# EAGLE board board (EAGLE 7.5.0)
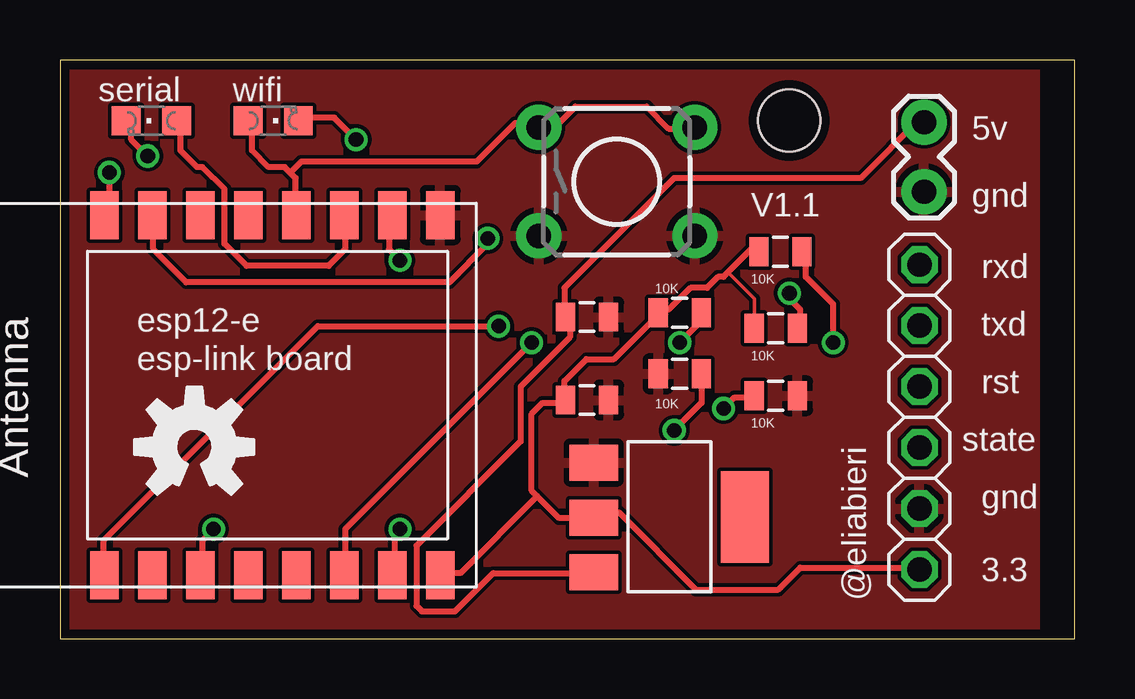
[diagram p0: board, top side]
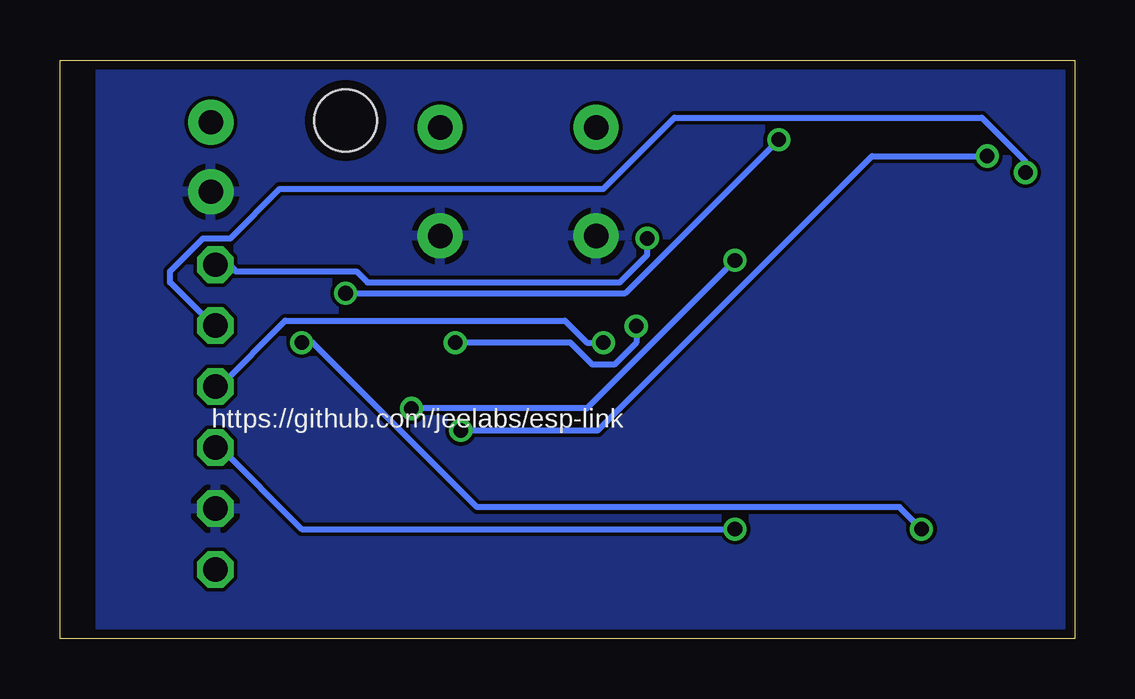
[diagram p1: board, bottom side, seen from below]

Size 42.31 x 24.12 mm. Coordinates in mm from the lower left corner, seen from the top.
Outline: 0,0 42.31,0 42.31,24.12 0,24.12 0,0
Copper layers (1*16): Top 0.0356mm / dielectric 1.5011mm / Bottom 0.0356mm
Design rules "LaenPCBOrder": minimum track width 6mil, minimum drill 13mil, track to track 6mil, track to pad 6mil, pad to pad 6mil, via to via 6mil, smd to smd 6mil, copper to edge 15mil, drill to drill 6mil, minimum pad ring 7mil, minimum via ring 7mil, stop-mask expansion 3mil, vias tented up to drill 0mil, thermal gap 10mil
Holes 2.6 mm at 30.4,21.6

## Footprints (pad centres in the part's own frame; a part is rotated, then mirrored left to right if it is on the bottom)
TACTILE-PTH = drill 1.016 pad 1.88: 1 -3.251,2.261; 2 3.251,2.261; 3 -3.251,-2.261; 4 3.251,-2.261
0805 = smd 0.8 x 1.2: 1 -0.9,0; 2 0.9,0
1X06 = drill 1.016 octagon: 1 -6.35,0; 2 -3.81,0; 3 -1.27,0; 4 1.27,0; 5 3.81,0; 6 6.35,0
SOT223 = smd 1.499 x 2.007: 1 -2.261,-3.15; 2 0.025,-3.15; 3 2.311,-3.15 | smd 3.81 x 2.007: 4 0,3.15
1X02_LOCK = drill 1.016 pad 1.88: 1 -0.178,0; 2 2.718,0
CHIPLED_0805 = smd 1.2 x 1.2: A 0,-1.05; C 0,1.05
ESP-12 = smd 2 x 1.2: 1 -7.5,4.5; 2 -7.5,2.5; 3 -7.5,0.5; 4 -7.5,-1.5; 5 -7.5,-3.5; 6 -7.5,-5.5; 7 -7.5,-7.5; 8 -7.5,-9.5; 9 7.5,-9.5; 10 7.5,-7.5; 11 7.5,-5.5; 12 7.5,-3.5; 13 7.5,-1.5; 14 7.5,0.5; 15 7.5,2.5; 16 7.5,4.5

## Placement (x,y rotation side)
BTN  [TACTILE-PTH]  23.21,19.05 0 top
CHPDUP  10K  [0805]  30.03,16.13 180 top
GPIO15DOWN  10K  [0805]  29.84,10.13 180 top
HEADER  [1X06]  35.83,9.24 270 top
IC1  REG1117  [SOT223]  25.4,5.08 270 top
INPUTCAP  10uF  [0805]  21.97,13.41 0 top
JP1  [1X02_LOCK]  36.02,18.81 90 top
OUTPUTCAP  10uF  [0805]  21.97,9.95 0 top
RSTUP  10K  [0805]  25.84,13.59 180 top
SERIAL  [CHIPLED_0805]  3.81,21.59 90 top
SERRES  10K  [0805]  25.84,11.05 180 top
U$1  [OSHW-LOGO-M]  5.6,8 0 top
WIFI  [CHIPLED_0805]  8.89,21.59 270 top
WIFIRES  10K  [0805]  29.84,12.94 180 top
X1  [ESP-12]  6.35,10.16 90 top

## Library data of the parts
BTN = SparkFun-Retired
CHPDUP GPIO15DOWN INPUTCAP OUTPUTCAP RSTUP SERRES WIFIRES = SparkFun-Passives
HEADER SERIAL WIFI X1 = adafruit
IC1 = 1117; MPN: REG1117; OC_FARNELL: 1097566; OC_NEWARK: 14P6981
JP1 = SparkFun-Connectors
U$1 = SparkFun-Aesthetics

## Nets
GND: BTN.3 BTN.4 GPIO15DOWN.1 HEADER.5 IC1.1 INPUTCAP.2 JP1.1 OUTPUTCAP.2 SERRES.2 X1.9
N$1: HEADER.1 X1.15
N$2: HEADER.2 X1.16
N$3: HEADER.3 X1.6
N$4: HEADER.4 X1.7
N$5: BTN.1 BTN.2 WIFI.A X1.12
N$6: SERIAL.C SERRES.1
N$7: WIFI.C WIFIRES.1
N$8: CHPDUP.1 X1.3
N$9: SERIAL.A X1.11
N$10: GPIO15DOWN.2 X1.10
N$11: RSTUP.1 X1.1
N$12: IC1.3 INPUTCAP.1 JP1.2
VCC: CHPDUP.2 HEADER.6 IC1.2 OUTPUTCAP.1 RSTUP.2 WIFIRES.2 X1.8

## Tracks (layer width: path | path; a pad name or v marks a point on that pad's centre or on a via)
GND
  pour Bottom: 0,0 0,24.13 40.64,24.13 40.64,0
  pour Top: 0,0 0,24.13 40.64,24.13 40.64,0
N$1  (via drill 0.61)
  Top 0.254: v17.83,16.69 17.83,16.46 16.23,14.86 5.26,14.86 3.89,16.23 3.89,17.6 X1.15
  Bottom 0.254: v17.83,16.69 17.83,16 18.97,14.86 29.49,14.86 29.95,15.32 34.98,15.32 35.2,15.54 35.66,15.54 HEADER.1
N$2  (via drill 0.61)
  Top 0.254: v2.06,19.43 2.06,17.83 X1.16
  Bottom 0.254: v2.06,19.43 2.06,19.89 3.89,21.72 16.69,21.72 19.66,18.75 33.15,18.75 35.2,16.69 36.35,16.69 37.72,15.32 37.72,14.86 35.89,13.03 HEADER.2
N$3  (via drill 0.61)
  Top 0.254: v19.66,12.34 11.89,4.57 11.89,2.74 X1.6
  Bottom 0.254: v19.66,12.34 20.34,12.34 21.26,13.26 32.92,13.26 35.66,10.52 HEADER.3
N$4  (via drill 0.61)
  Top 0.254: v14.17,4.57 13.95,4.34 13.95,2.74 X1.7
  Bottom 0.254: v14.17,4.57 32.23,4.57 35.66,8 HEADER.4
N$5
  Top 0.254: 9.6,19.43 9.83,19.2 9.83,17.83 X1.12 | 9.6,19.43 9.37,19.66 8.69,19.66 8,20.34 8,21.49 WIFI.A | 9.6,19.43 10.06,19.89 17.37,19.89 18.97,21.49 19.89,21.49 BTN.1 20.12,21.49 20.8,21.49 21.49,22.17 24.46,22.17 25.38,21.26 26.29,21.26 BTN.2
N$6  (via drill 0.61)
  Top 0.254: v3.66,20.12 2.97,20.8 2.97,21.49 SERIAL.C | v25.6,8.69 26.75,9.83 26.75,10.97 SERRES.1
  Bottom 0.254: v3.66,20.12 8.46,20.12 19.89,8.69 v25.6,8.69
N$7  (via drill 0.61)
  Top 0.254: v12.34,20.8 11.43,21.72 10.06,21.72 WIFI.C | v30.4,14.4 30.4,14.17 30.86,13.72 30.86,13.03 WIFIRES.1
  Bottom 0.254: v12.34,20.8 18.75,14.4 v30.4,14.4
N$8  (via drill 0.61)
  Top 0.254: v32.23,12.34 32.23,13.95 31.09,15.09 31.09,16 CHPDUP.1 | v6.4,4.57 5.94,4.12 5.94,2.74 X1.3
  Bottom 0.254: v32.23,12.34 31.77,12.34 24.92,5.49 7.32,5.49 v6.4,4.57
N$9
  Top 0.254: SERIAL.A 5.03,21.49 5.03,20.34 5.71,19.66 5.94,19.66 6.86,18.75 6.86,16.46 7.77,15.54 11.2,15.54 11.89,16.23 11.89,17.6 X1.11
N$10  (via drill 0.61)
  Top 0.254: v27.66,9.6 28.12,10.06 28.8,10.06 GPIO15DOWN.2 | v14.17,15.77 13.72,16.23 13.72,17.6 X1.10
  Bottom 0.254: v27.66,9.6 20.34,9.6 v14.17,15.77
N$11  (via drill 0.61)
  Top 0.254: v25.83,12.34 26.52,13.03 26.52,13.49 RSTUP.1 | v18.29,13.03 10.74,13.03 1.83,4.12 1.83,2.74 X1.1
  Bottom 0.254: v25.83,12.34 21.03,12.34 20.12,11.43 19.2,11.43 18.29,12.34 v18.29,13.03
N$12
  Top 0.254: JP1.2 35.89,21.72 33.38,19.2 25.6,19.2 21.03,14.63 21.03,13.49 INPUTCAP.1 21.26,13.26 21.26,12.57 19.2,10.52 19.2,8.23 14.86,3.89 14.86,1.37 15.09,1.14 16.46,1.14 18.06,2.74 22.17,2.74 IC1.3
VCC
  Top 0.152: 27.85,15.28 28.96,14.17 28.96,12.95 WIFIRES.2
  Top 0.254: CHPDUP.2 29.26,16.23 29.03,16.46 27.85,15.28 27.66,15.09 27.43,15.09 26.98,14.63 26.29,14.63 25.38,13.72 25.15,13.72 RSTUP.2 24.92,13.49 23.09,11.66 21.95,11.66 21.03,10.74 21.03,10.06 OUTPUTCAP.1 21.03,9.83 20.12,9.83 19.66,9.37 19.66,6.17 19.89,5.94 | 19.89,5.94 20.8,5.03 22.17,5.03 IC1.2 22.4,5.26 23.32,5.26 26.52,2.06 29.95,2.06 30.86,2.97 35.66,2.97 HEADER.6 | 19.89,5.94 16.69,2.74 16,2.74 X1.8

## Text on the board
tNames: serial | wifi | 5v | V1.1 | gnd | 10K | rxd | 10K | esp12-e | txd | 10K | esp-link board | 10K | rst | 10K | state | gnd | @eliabieri | 3.3
bNames: https://github.com/jeelabs/esp-link